# EAGLE board SimulatorT2SecondPCRevB_panel4 (EAGLE 7.7.0)
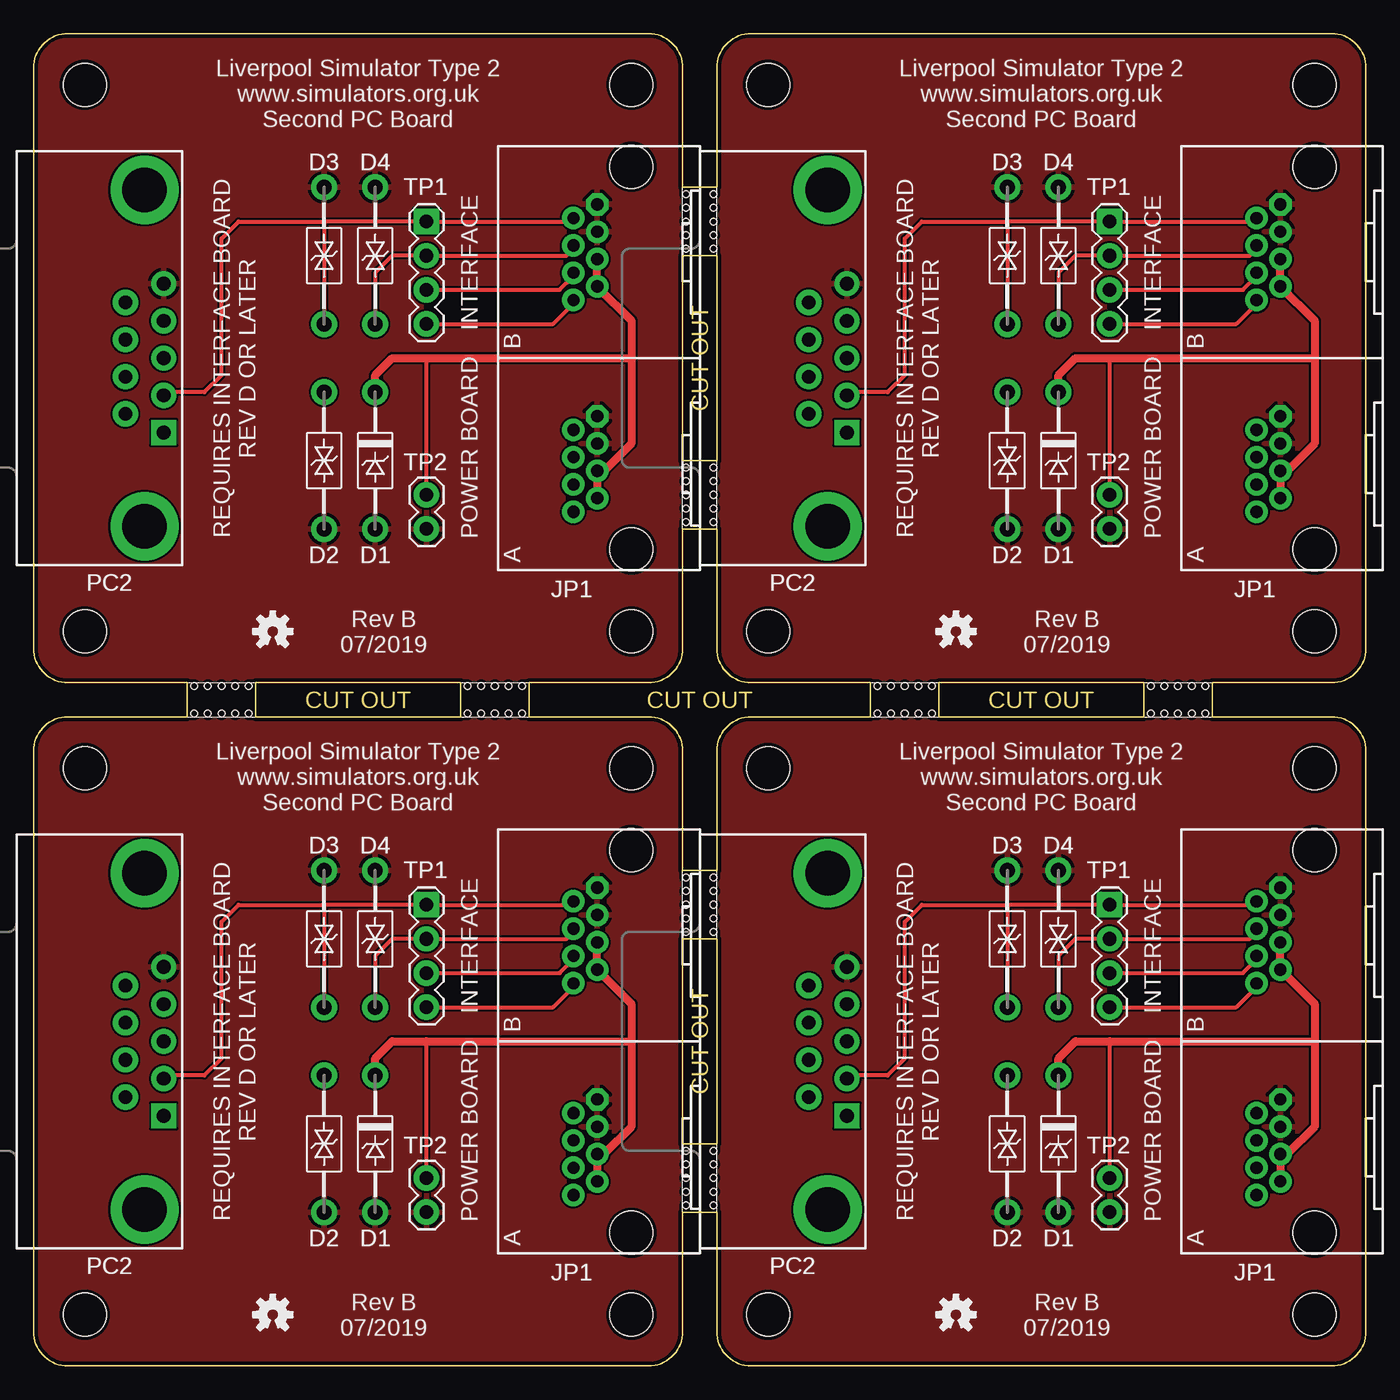
[diagram p0: board, top side]
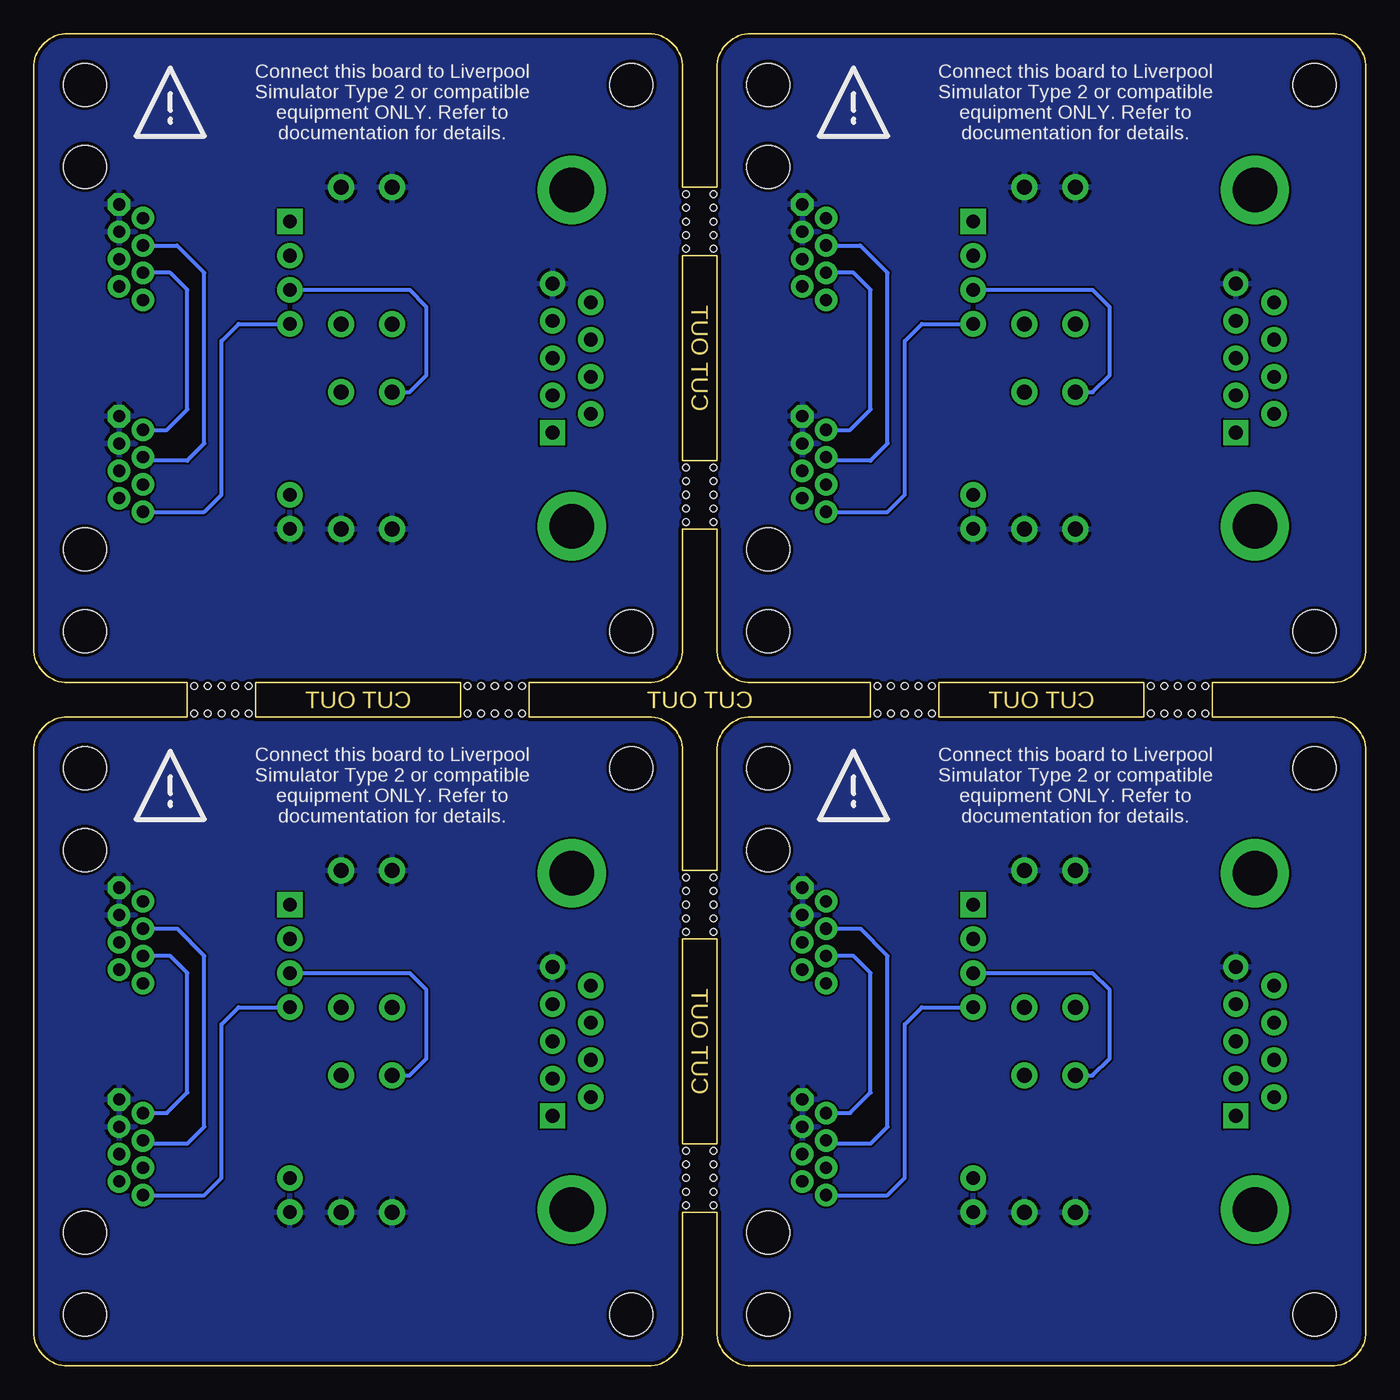
[diagram p1: board, bottom side, seen from below]

Size 99.06 x 99.06 mm. Coordinates in mm from the lower left corner, seen from the top.
Copper layers (1*16): Top 0.035mm / dielectric 1.5mm / Bottom 0.035mm
Design rules "SeeedStudio_2layer_DRU_no_angle_20140221": minimum track width 6mil, minimum drill 12mil, track to track 6mil, track to pad 6mil, pad to pad 6mil, via to via 6mil, smd to smd 0mil, copper to edge 10mil, drill to drill 10mil, minimum pad ring 10mil, minimum via ring 6mil, stop-mask expansion 2mil, vias tented up to drill 100mil, thermal gap 10mil
Holes 3.2 mm at 3.81,3.81 3.81,44.45 44.45,44.45 44.45,3.81 54.61,3.81 54.61,44.45 95.25,44.45 95.25,3.81 3.81,54.61 3.81,95.25 44.45,95.25 44.45,54.61 54.61,54.61 54.61,95.25 95.25,95.25 95.25,54.61

## Footprints (pad centres in the part's own frame; a part is rotated, then mirrored left to right if it is on the bottom)
DO41_TVS_UNI = drill 1.118 pad 1.93: ANODE -5.08,0; CATHODE 5.08,0
DO41_TVS_BI = drill 1.118 pad 1.93: A 5.08,0; C -5.08,0
OUTLINE_PANEL_4_5MM = hole 0.5: 33.274,50.546; 34.29,50.546; 35.306,50.546; 64.77,48.514; 65.786,48.514; 63.754,48.514; 63.754,50.546; 64.77,50.546; 65.786,50.546; 50.546,85.09; 50.546,86.106; 50.546,84.074; 48.514,85.09; 48.514,86.106; 36.322,50.546; 32.258,50.546; 12.954,50.546; 13.97,50.546; 14.986,50.546; 16.002,50.546; 11.938,50.546; 62.738,50.546; 66.802,50.546; 62.738,48.514; 66.802,48.514; 34.29,48.514; 35.306,48.514; 33.274,48.514; 32.258,48.514; 36.322,48.514; 13.97,48.514; 14.986,48.514; 12.954,48.514; 11.938,48.514; 16.002,48.514; 85.09,48.514; 86.106,48.514; 84.074,48.514; 84.074,50.546; 85.09,50.546; 86.106,50.546; 83.058,50.546; 87.122,50.546; 83.058,48.514; 87.122,48.514; 50.546,83.058; 48.514,84.074; 48.514,83.058; 50.546,87.122; 48.514,87.122; 50.546,64.77; 50.546,65.786; 50.546,63.754; 48.514,64.77; 48.514,65.786; 50.546,62.738; 48.514,63.754; 48.514,62.738; 50.546,66.802; 48.514,66.802; 50.546,34.29; 50.546,35.306; 50.546,33.274; 48.514,34.29; 48.514,35.306; 50.546,32.258; 48.514,33.274; 48.514,32.258; 50.546,36.322; 48.514,36.322; 50.546,13.97; 50.546,14.986; 50.546,12.954; 48.514,13.97; 48.514,14.986; 50.546,11.938; 48.514,12.954; 48.514,11.938; 50.546,16.002; 48.514,16.002
RJ45-RJHSE-5080-02 = drill 0.9 pad 1.676 octagon: A1 -4.318,2.54; B1 11.43,2.54 | drill 0.9 pad 1.676: A2 -5.334,4.318; A3 -6.35,2.54; A4 -7.366,4.318; A5 -8.382,2.54; A6 -9.398,4.318; A7 -10.414,2.54; A8 -11.43,4.318; B2 10.414,4.318; B3 9.398,2.54; B4 8.382,4.318; B5 7.366,2.54; B6 6.35,4.318; B7 5.334,2.54; B8 4.318,4.318 | hole 3.2: -14.224,0; 14.224,0
MULTICOMP-DB9-FEMALE-PCB-90DEG = drill 1.016 pad 1.88 square: 1 -5.54,-10.945 | drill 1.016 pad 1.88: 2 -2.77,-10.945; 3 0,-10.945; 4 2.77,-10.945; 5 5.54,-10.945; 6 -4.15,-8.105; 7 -1.38,-8.105; 8 1.38,-8.105; 9 4.15,-8.105 | drill 3.302 pad 5.08: G1 -12.496,-9.525; G2 12.496,-9.525
1X04 = drill 1.016 pad 1.88 square: 1 0,0 | drill 1.016 pad 1.88: 2 2.54,0; 3 5.08,0; 4 7.62,0
1X02 = drill 1.016 pad 1.88: 1 0,0; 2 2.54,0

## Placement (x,y rotation side)
D1  SA12A  [DO41_TVS_UNI]  25.4,16.51 90 top
D1_1  SA12A  [DO41_TVS_UNI]  76.2,16.51 90 top
D1_2  SA12A  [DO41_TVS_UNI]  25.4,67.31 90 top
D1_3  SA12A  [DO41_TVS_UNI]  76.2,67.31 90 top
D2  SA15CA  [DO41_TVS_BI]  21.59,16.51 270 top
D2_1  SA15CA  [DO41_TVS_BI]  72.39,16.51 270 top
D2_2  SA15CA  [DO41_TVS_BI]  21.59,67.31 270 top
D2_3  SA15CA  [DO41_TVS_BI]  72.39,67.31 270 top
D3  SA15CA  [DO41_TVS_BI]  21.59,31.75 90 top
D3_1  SA15CA  [DO41_TVS_BI]  72.39,31.75 90 top
D3_2  SA15CA  [DO41_TVS_BI]  21.59,82.55 90 top
D3_3  SA15CA  [DO41_TVS_BI]  72.39,82.55 90 top
D4  SA15CA  [DO41_TVS_BI]  25.4,31.75 90 top
D4_1  SA15CA  [DO41_TVS_BI]  76.2,31.75 90 top
D4_2  SA15CA  [DO41_TVS_BI]  25.4,82.55 90 top
D4_3  SA15CA  [DO41_TVS_BI]  76.2,82.55 90 top
E$1  [OUTLINE_PANEL_4_5MM]  0,0 0 top
E$2  [WARNING_TRIANGLE_TPLACE]  38.1,40.64 0 bottom
E$3  [WARNING_TRIANGLE_TPLACE]  88.9,40.64 0 bottom
E$4  [WARNING_TRIANGLE_TPLACE]  88.9,91.44 0 bottom
E$5  [WARNING_TRIANGLE_TPLACE]  38.1,91.44 0 bottom
JP1  RJ45-RJHSE-5080-022HOLE  [RJ45-RJHSE-5080-02]  44.45,24.13 90 top
JP1_1  RJ45-RJHSE-5080-022HOLE  [RJ45-RJHSE-5080-02]  95.25,24.13 90 top
JP1_2  RJ45-RJHSE-5080-022HOLE  [RJ45-RJHSE-5080-02]  44.45,74.93 90 top
JP1_3  RJ45-RJHSE-5080-022HOLE  [RJ45-RJHSE-5080-02]  95.25,74.93 90 top
LOGO1  OSHW-LOGOS  [OSHW-LOGO-S]  17.78,3.81 0 top
LOGO1_1  OSHW-LOGOS  [OSHW-LOGO-S]  68.58,3.81 0 top
LOGO1_2  OSHW-LOGOS  [OSHW-LOGO-S]  17.78,54.61 0 top
LOGO1_3  OSHW-LOGOS  [OSHW-LOGO-S]  68.58,54.61 0 top
PC2  [MULTICOMP-DB9-FEMALE-PCB-90DEG]  -1.27,24.13 90 top
PC2_1  [MULTICOMP-DB9-FEMALE-PCB-90DEG]  49.53,24.13 90 top
PC2_2  [MULTICOMP-DB9-FEMALE-PCB-90DEG]  -1.27,74.93 90 top
PC2_3  [MULTICOMP-DB9-FEMALE-PCB-90DEG]  49.53,74.93 90 top
TP1  [1X04]  29.21,34.29 270 top
TP1_1  [1X04]  80.01,34.29 270 top
TP1_2  [1X04]  29.21,85.09 270 top
TP1_3  [1X04]  80.01,85.09 270 top
TP2  [1X02]  29.21,13.97 270 top
TP2_1  [1X02]  80.01,13.97 270 top
TP2_2  [1X02]  29.21,64.77 270 top
TP2_3  [1X02]  80.01,64.77 270 top

## Library data of the parts
D1-D4 E$1-E$5 JP1 PC2 = AIC_Custom
D1_1-D1_3 = AIC_Custom; NAME1: D1
D2_1-D2_3 = AIC_Custom; NAME1: D2
D3_1-D3_3 = AIC_Custom; NAME1: D3
D4_1-D4_3 = AIC_Custom; NAME1: D4
JP1_1-JP1_3 = AIC_Custom; NAME1: JP1
LOGO1 LOGO1_1-LOGO1_3 = SparkFun-Aesthetics
PC2_1-PC2_3 = AIC_Custom; NAME1: PC2
TP1 TP2 = SparkFun-Connectors
TP1_1-TP1_3 = SparkFun-Connectors; NAME1: TP1
TP2_1-TP2_3 = SparkFun-Connectors; NAME1: TP2

## Nets
GND: D1.ANODE D2.A D3.A D4.A JP1.A1 JP1.A3 JP1.B1 JP1.B3 PC2.5 TP2.2
GND1: D1_1.ANODE D2_1.A D3_1.A D4_1.A JP1_1.A1 JP1_1.A3 JP1_1.B1 JP1_1.B3 PC2_1.5 TP2_1.2
GND2: D1_2.ANODE D2_2.A D3_2.A D4_2.A JP1_2.A1 JP1_2.A3 JP1_2.B1 JP1_2.B3 PC2_2.5 TP2_2.2
GND3: D1_3.ANODE D2_3.A D3_3.A D4_3.A JP1_3.A1 JP1_3.A3 JP1_3.B1 JP1_3.B3 PC2_3.5 TP2_3.2
P8: JP1.A8 JP1.B8 TP1.4
P81: JP1_1.A8 JP1_1.B8 TP1_1.4
P82: JP1_2.A8 JP1_2.B8 TP1_2.4
P83: JP1_3.A8 JP1_3.B8 TP1_3.4
RXD: D4.C JP1.A4 JP1.B4 TP1.2
RXD1: D4_1.C JP1_1.A4 JP1_1.B4 TP1_1.2
RXD2: D4_2.C JP1_2.A4 JP1_2.B4 TP1_2.2
RXD3: D4_3.C JP1_3.A4 JP1_3.B4 TP1_3.2
TX2: D2.C JP1.A2 JP1.B6 TP1.3
TX21: D2_1.C JP1_1.A2 JP1_1.B6 TP1_1.3
TX22: D2_2.C JP1_2.A2 JP1_2.B6 TP1_2.3
TX23: D2_3.C JP1_3.A2 JP1_3.B6 TP1_3.3
TXD: D3.C JP1.B2 PC2.2 TP1.1
TXD1: D3_1.C JP1_1.B2 PC2_1.2 TP1_1.1
TXD2: D3_2.C JP1_2.B2 PC2_2.2 TP1_2.1
TXD3: D3_3.C JP1_3.B2 PC2_3.2 TP1_3.1
VIN2: D1.CATHODE JP1.A5 JP1.A7 JP1.B5 JP1.B7 TP2.1
VIN21: D1_1.CATHODE JP1_1.A5 JP1_1.A7 JP1_1.B5 JP1_1.B7 TP2_1.1
VIN22: D1_2.CATHODE JP1_2.A5 JP1_2.A7 JP1_2.B5 JP1_2.B7 TP2_2.1
VIN23: D1_3.CATHODE JP1_3.A5 JP1_3.A7 JP1_3.B5 JP1_3.B7 TP2_3.1

## Tracks (layer width: path | path; a pad name or v marks a point on that pad's centre or on a via)
GND
  pour Bottom: 2.54,48.26 45.72,48.26 arc-90 48.26,45.72 48.26,2.54 arc-90 45.72,0 2.54,0 arc-90 0,2.54 0,45.72 arc-90
  pour Top: 2.54,48.26 45.72,48.26 arc-90 48.26,45.72 48.26,2.54 arc-90 45.72,0 2.54,0 arc-90 0,2.54 0,45.72 arc-90
GND1
  pour Bottom: 53.34,48.26 96.52,48.26 arc-90 99.06,45.72 99.06,2.54 arc-90 96.52,0 53.34,0 arc-90 50.8,2.54 50.8,45.72 arc-90
  pour Top: 53.34,48.26 96.52,48.26 arc-90 99.06,45.72 99.06,2.54 arc-90 96.52,0 53.34,0 arc-90 50.8,2.54 50.8,45.72 arc-90
GND2
  pour Bottom: 2.54,99.06 45.72,99.06 arc-90 48.26,96.52 48.26,53.34 arc-90 45.72,50.8 2.54,50.8 arc-90 0,53.34 0,96.52 arc-90
  pour Top: 2.54,99.06 45.72,99.06 arc-90 48.26,96.52 48.26,53.34 arc-90 45.72,50.8 2.54,50.8 arc-90 0,53.34 0,96.52 arc-90
GND3
  pour Bottom: 53.34,99.06 96.52,99.06 arc-90 99.06,96.52 99.06,53.34 arc-90 96.52,50.8 53.34,50.8 arc-90 50.8,53.34 50.8,96.52 arc-90
  pour Top: 53.34,99.06 96.52,99.06 arc-90 99.06,96.52 99.06,53.34 arc-90 96.52,50.8 53.34,50.8 arc-90 50.8,53.34 50.8,96.52 arc-90
P8
  Top 0.305: JP1.B8 40.13,28.19 38.61,26.67 TP1.4
  Bottom 0.305: JP1.A8 35.56,12.7 34.29,13.97 34.29,25.4 33.02,26.67 TP1.4
P81
  Top 0.305: JP1_1.B8 90.93,28.19 89.41,26.67 TP1_1.4
  Bottom 0.305: JP1_1.A8 86.36,12.7 85.09,13.97 85.09,25.4 83.82,26.67 TP1_1.4
P82
  Top 0.305: JP1_2.B8 40.13,78.99 38.61,77.47 TP1_2.4
  Bottom 0.305: JP1_2.A8 35.56,63.5 34.29,64.77 34.29,76.2 33.02,77.47 TP1_2.4
P83
  Top 0.305: JP1_3.B8 90.93,78.99 89.41,77.47 TP1_3.4
  Bottom 0.305: JP1_3.A8 86.36,63.5 85.09,64.77 85.09,76.2 83.82,77.47 TP1_3.4
RXD
  Top 0.305: JP1.B4 40.13,32.26 39.62,31.75 TP1.2 26.67,31.75 25.4,30.48 D4.C
  Bottom 0.305: JP1.A4 39.88,16.51 36.83,16.51 35.56,17.78 35.56,30.48 37.59,32.51 JP1.B4
RXD1
  Top 0.305: JP1_1.B4 90.93,32.26 90.42,31.75 TP1_1.2 77.47,31.75 76.2,30.48 D4_1.C
  Bottom 0.305: JP1_1.A4 90.68,16.51 87.63,16.51 86.36,17.78 86.36,30.48 88.39,32.51 JP1_1.B4
RXD2
  Top 0.305: JP1_2.B4 40.13,83.06 39.62,82.55 TP1_2.2 26.67,82.55 25.4,81.28 D4_2.C
  Bottom 0.305: JP1_2.A4 39.88,67.31 36.83,67.31 35.56,68.58 35.56,81.28 37.59,83.31 JP1_2.B4
RXD3
  Top 0.305: JP1_3.B4 90.93,83.06 90.42,82.55 TP1_3.2 77.47,82.55 76.2,81.28 D4_3.C
  Bottom 0.305: JP1_3.A4 90.68,67.31 87.63,67.31 86.36,68.58 86.36,81.28 88.39,83.31 JP1_3.B4
TX2
  Top 0.305: TP1.3 39.12,29.21 40.13,30.23 JP1.B6
  Bottom 0.305: TP1.3 20.32,29.21 19.05,27.94 19.05,22.86 20.32,21.59 D2.C | JP1.A2 38.35,18.8 36.83,20.32 36.83,29.21 38.1,30.48 JP1.B6
TX21
  Top 0.305: TP1_1.3 89.92,29.21 90.93,30.23 JP1_1.B6
  Bottom 0.305: TP1_1.3 71.12,29.21 69.85,27.94 69.85,22.86 71.12,21.59 D2_1.C | JP1_1.A2 89.15,18.8 87.63,20.32 87.63,29.21 88.9,30.48 JP1_1.B6
TX22
  Top 0.305: TP1_2.3 39.12,80.01 40.13,81.03 JP1_2.B6
  Bottom 0.305: TP1_2.3 20.32,80.01 19.05,78.74 19.05,73.66 20.32,72.39 D2_2.C | JP1_2.A2 38.35,69.6 36.83,71.12 36.83,80.01 38.1,81.28 JP1_2.B6
TX23
  Top 0.305: TP1_3.3 89.92,80.01 90.93,81.03 JP1_3.B6
  Bottom 0.305: TP1_3.3 71.12,80.01 69.85,78.74 69.85,73.66 71.12,72.39 D2_3.C | JP1_3.A2 89.15,69.6 87.63,71.12 87.63,80.01 88.9,81.28 JP1_3.B6
TXD
  Top 0.305: JP1.B2 39.88,34.29 TP1.1 21.59,34.29 | 21.59,34.29 D3.C | PC2.2 9.9,21.59 12.7,21.59 13.97,22.86 13.97,33.02 15.24,34.29 21.59,34.29
TXD1
  Top 0.305: JP1_1.B2 90.68,34.29 TP1_1.1 72.39,34.29 | 72.39,34.29 D3_1.C | PC2_1.2 60.7,21.59 63.5,21.59 64.77,22.86 64.77,33.02 66.04,34.29 72.39,34.29
TXD2
  Top 0.305: JP1_2.B2 39.88,85.09 TP1_2.1 21.59,85.09 | 21.59,85.09 D3_2.C | PC2_2.2 9.9,72.39 12.7,72.39 13.97,73.66 13.97,83.82 15.24,85.09 21.59,85.09
TXD3
  Top 0.305: JP1_3.B2 90.68,85.09 TP1_3.1 72.39,85.09 | 72.39,85.09 D3_3.C | PC2_3.2 60.7,72.39 63.5,72.39 64.77,73.66 64.77,83.82 66.04,85.09 72.39,85.09
VIN2
  Top 0.305: TP2.1 29.21,24.13
  Top 0.406: 42.42,15.75 JP1.A5
  Top 0.61: JP1.B5 JP1.B7 44.45,26.92 44.45,24.13 | 44.45,24.13 44.45,17.78 42.42,15.75 | JP1.A5 JP1.A7 | D1.CATHODE 25.4,22.86 26.67,24.13 29.21,24.13 44.45,24.13
VIN21
  Top 0.305: TP2_1.1 80.01,24.13
  Top 0.406: 93.22,15.75 JP1_1.A5
  Top 0.61: JP1_1.B5 JP1_1.B7 95.25,26.92 95.25,24.13 | 95.25,24.13 95.25,17.78 93.22,15.75 | JP1_1.A5 JP1_1.A7 | D1_1.CATHODE 76.2,22.86 77.47,24.13 80.01,24.13 95.25,24.13
VIN22
  Top 0.305: TP2_2.1 29.21,74.93
  Top 0.406: 42.42,66.55 JP1_2.A5
  Top 0.61: JP1_2.B5 JP1_2.B7 44.45,77.72 44.45,74.93 | 44.45,74.93 44.45,68.58 42.42,66.55 | JP1_2.A5 JP1_2.A7 | D1_2.CATHODE 25.4,73.66 26.67,74.93 29.21,74.93 44.45,74.93
VIN23
  Top 0.305: TP2_3.1 80.01,74.93
  Top 0.406: 93.22,66.55 JP1_3.A5
  Top 0.61: JP1_3.B5 JP1_3.B7 95.25,77.72 95.25,74.93 | 95.25,74.93 95.25,68.58 93.22,66.55 | JP1_3.A5 JP1_3.A7 | D1_3.CATHODE 76.2,73.66 77.47,74.93 80.01,74.93 95.25,74.93

## Text on the board
tPlace: Liverpool Simulator Type 2 / www.simulators.org.uk / Second PC Board | Liverpool Simulator Type 2 / www.simulators.org.uk / Second PC Board | REQUIRES INTERFACE BOARD / REV D OR LATER | REQUIRES INTERFACE BOARD / REV D OR LATER | POWER BOARD INTERFACE | POWER BOARD INTERFACE | Rev B / 07/2019 | Rev B / 07/2019 | Liverpool Simulator Type 2 / www.simulators.org.uk / Second PC Board | Liverpool Simulator Type 2 / www.simulators.org.uk / Second PC Board | REQUIRES INTERFACE BOARD / REV D OR LATER | REQUIRES INTERFACE BOARD / REV D OR LATER | POWER BOARD INTERFACE | POWER BOARD INTERFACE | Rev B / 07/2019 | Rev B / 07/2019
bPlace: Connect this board to Liverpool / Simulator Type 2 or compatible / equipment ONLY. Refer to / documentation for details. | Connect this board to Liverpool / Simulator Type 2 or compatible / equipment ONLY. Refer to / documentation for details. | Connect this board to Liverpool / Simulator Type 2 or compatible / equipment ONLY. Refer to / documentation for details. | Connect this board to Liverpool / Simulator Type 2 or compatible / equipment ONLY. Refer to / documentation for details.
_tNames: D3 | D4 | D3 | D4 | TP1 | TP1 | TP2 | TP2 | D2 | D1 | D2 | D1 | PC2 | PC2 | JP1 | JP1 | D3 | D4 | D3 | D4 | TP1 | TP1 | TP2 | TP2 | D2 | D1 | D2 | D1 | PC2 | PC2 | JP1 | JP1